# EAGLE board controller_Dio Faziko Pratama (EAGLE 9.6.2)
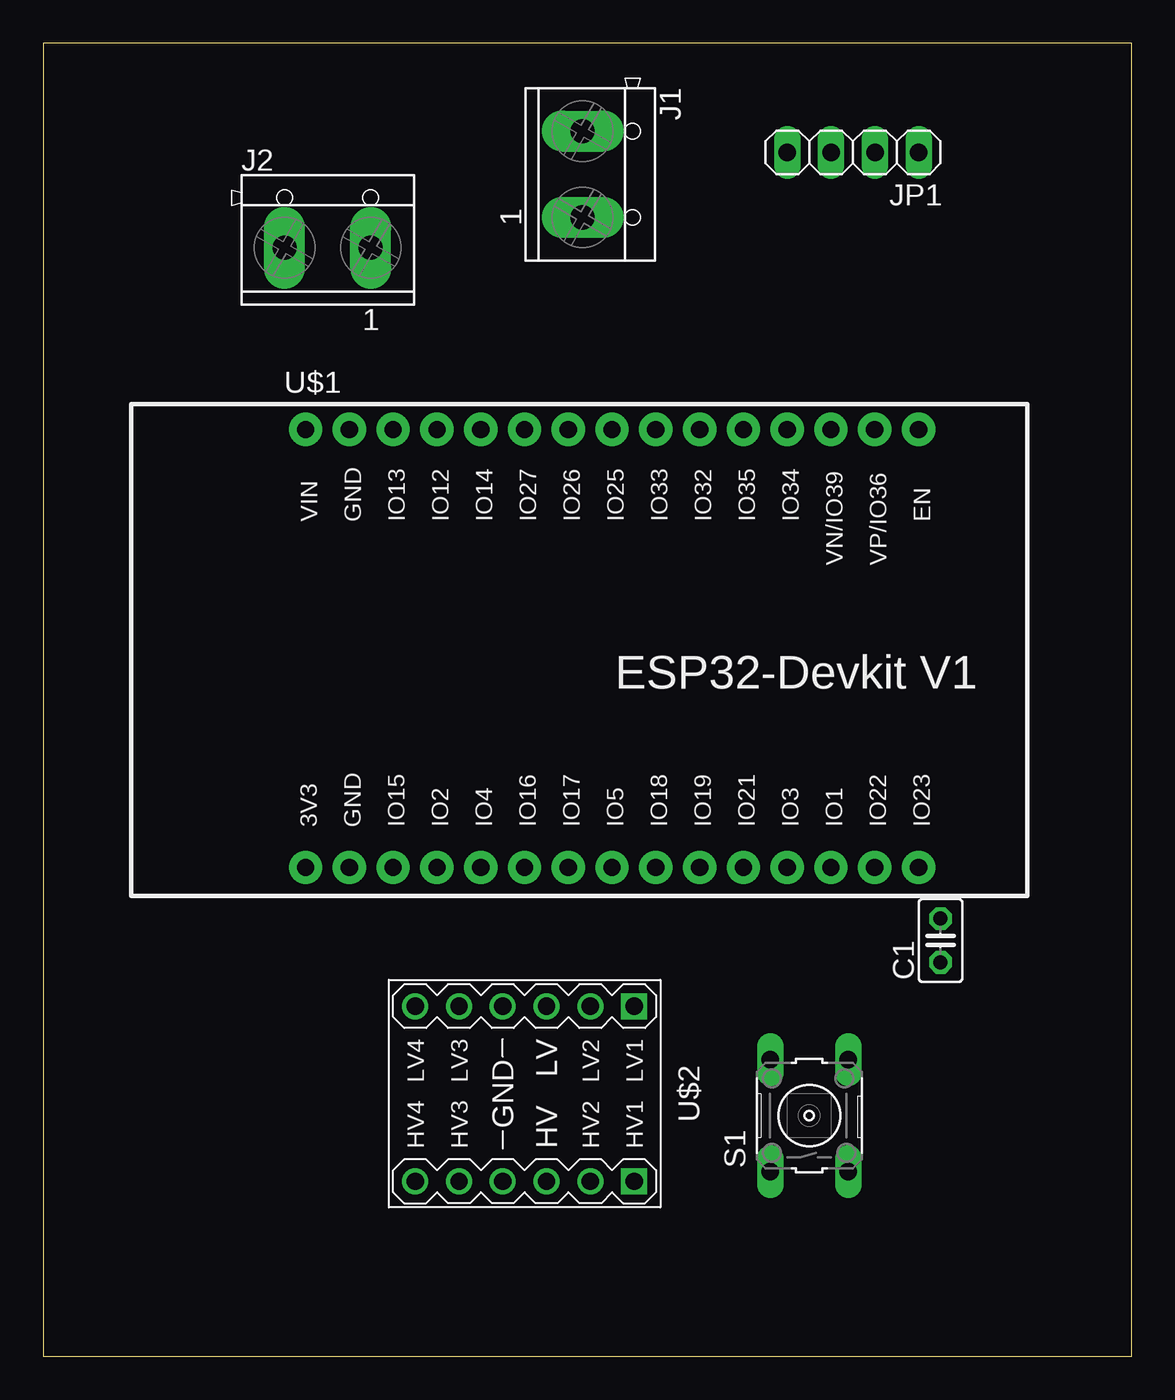
[diagram p0: board, top side]
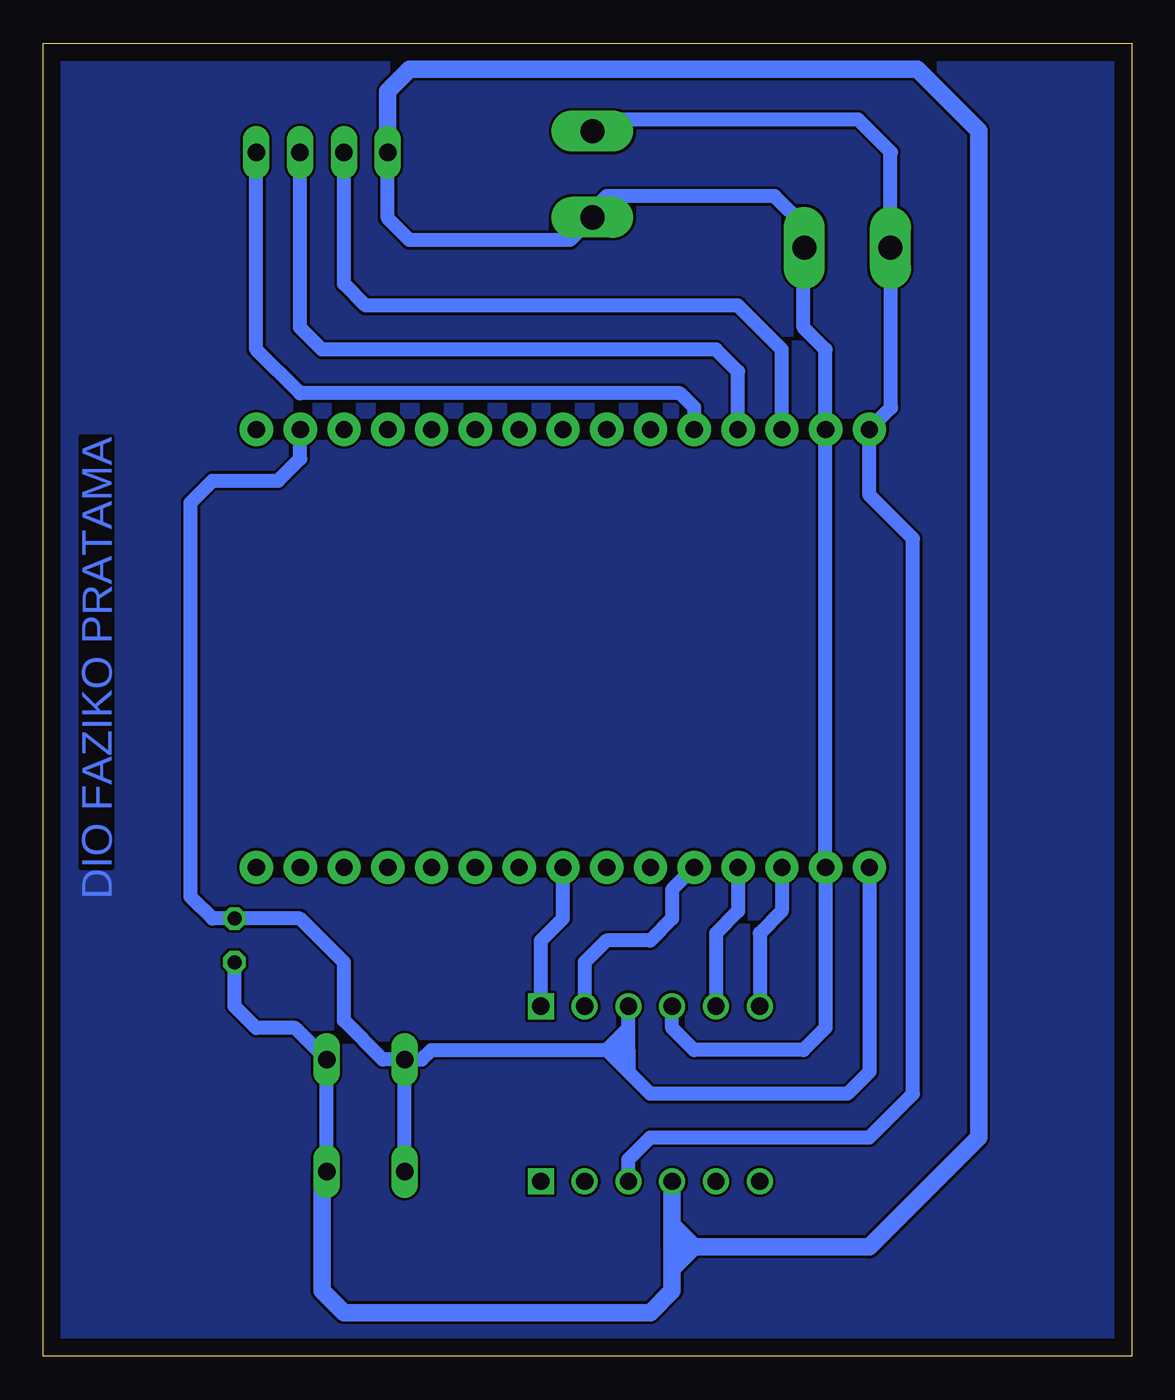
[diagram p1: board, bottom side, seen from below]

Size 63.17 x 76.19 mm. Coordinates in mm from the lower left corner, seen from the top.
Outline: 0,0 63.17,0 63.17,76.19 0,76.19 0,0
Copper layers (1*16): Top 0.035mm / dielectric 1.5mm / Bottom 0.035mm
Design rules "default": minimum track width 6mil, minimum drill 0.35mm, track to track 6mil, track to pad 6mil, pad to pad 6mil, via to via 6mil, smd to smd 6mil, copper to edge 40mil, drill to drill 6mil, minimum pad ring 10mil, minimum via ring 8mil, stop-mask expansion 4mil, vias tented up to drill 0mil, thermal gap 10mil

## Footprints (pad centres in the part's own frame; a part is rotated, then mirrored left to right if it is on the bottom)
C025-025X050 = drill 0.813 octagon: 1 -1.27,0; 2 1.27,0
TERMINAL_BLOCK_2P_5 = drill 1.4 pad 2.38 long: 1 2.5,-0.45; 2 -2.5,-0.45
1X04 = drill 1.016 long: 1 -3.81,0; 2 -1.27,0; 3 1.27,0; 4 3.81,0
B3F-10XX = drill 1.016 long: 1 -3.251,2.261; 2 3.251,2.261; 3 -3.251,-2.261; 4 3.251,-2.261
ESP32-DEVKITV1 = drill 1 pad 1.93: 3V3 -16.52,-12.27; D1 13.96,-12.27; D2 -8.9,-12.27; D3 11.42,-12.27; D4 -6.36,-12.27; D5 1.26,-12.27; D12 -8.9,13.135; D13 -11.44,13.135; D14 -6.36,13.135; D15 -11.44,-12.27; D16 -3.82,-12.27; D17 -1.28,-12.27; D18 3.8,-12.27; D19 6.34,-12.27; D21 8.88,-12.27; D22 16.5,-12.27; D23 19.04,-12.27; D25 1.26,13.135; D26 -1.28,13.135; D27 -3.82,13.135; D32 6.34,13.135; D33 3.8,13.135; D34 11.42,13.135; D35 8.88,13.135; D36 16.5,13.135; D39 13.96,13.135; EN 19.04,13.135; GND@1 -13.98,13.135; GND@2 -13.98,-12.27; VIN -16.52,13.135
LEVEL-SHIFTER-4CH = drill 1 square: J1.1 -5.08,6.35; J2.1 5.08,6.35 | drill 1: J1.2 -5.08,3.81; J1.3 -5.08,1.27; J1.4 -5.08,-1.27; J1.5 -5.08,-3.81; J1.6 -5.08,-6.35; J2.2 5.08,3.81; J2.3 5.08,1.27; J2.4 5.08,-1.27; J2.5 5.08,-3.81; J2.6 5.08,-6.35

## Placement (x,y rotation side)
C1  [C025-025X050]  52.07,24.13 90 top
J1  CON_TERMINAL_BLOCK_02-5MM  [TERMINAL_BLOCK_2P_5]  31.75,68.58 270 top
J2  CON_TERMINAL_BLOCK_02-5MM  [TERMINAL_BLOCK_2P_5]  16.51,64.77 0 top
JP1  [1X04]  46.99,69.85 180 top
S1  [B3F-10XX]  44.45,13.97 90 top
U$1  ESP32DEVKITV1  [ESP32-DEVKITV1]  31.75,40.64 0 top
U$2  LEVEL-SHIFTER-4CH  [LEVEL-SHIFTER-4CH]  27.94,15.24 270 top

## Library data of the parts
C1 = rcl; SPICEPREFIX: C
J1 J2 = tblok
JP1 = pinhead
S1 = switch-omron; MPN: B3F-1000; OC_FARNELL: 176432; OC_NEWARK: 36M3542
U$1 = esp32-devkitv1
U$2 = diy-model

## Nets
GND: C1.1 J1.1 J2.1 JP1.4 S1.3 S1.4 U$1.GND@1 U$1.GND@2 U$2.J1.4 U$2.J2.4
HV: J1.2 J2.2 U$1.VIN U$2.J2.3
LV: C1.2 S1.1 S1.2 U$1.3V3 U$1.D36 U$2.J1.3
LV1: U$1.D5 U$2.J1.1
LV2: U$1.D4 U$2.J1.2
LV3: U$1.D2 U$2.J1.5
LV4: U$1.D15 U$2.J1.6
OUT1: JP1.1 U$1.D14
OUT2: JP1.2 U$1.D12
OUT3: JP1.3 U$1.D13

## Tracks (layer width: path | path; a pad name or v marks a point on that pad's centre or on a via)
GND
  Bottom 0.813: U$2.J1.4 26.67,19.05 25.4,17.78 19.05,17.78 17.77,19.06 U$1.GND@2 U$1.GND@1 17.77,58.41 19.05,59.69 19.05,64.28 J2.1 19.01,65.59 20.73,67.31 30.48,67.31 31.3,66.49 J1.1 32.61,64.77 41.91,64.77 43.18,66.04 JP1.4 | S1.3 S1.4 48.54,19.05 50.8,19.05 52.07,20.32 C1.1
  Bottom 1.016: 26.67,6.35 25.4,6.35 | 25.4,6.35 15.24,6.35 8.89,12.7 8.89,71.12 12.44,74.67 41.91,74.67 43.18,73.4 JP1.4 | 26.67,6.35 26.67,5.08 | 26.67,5.08 26.67,3.81 27.94,2.54 45.72,2.54 46.99,3.81 46.99,10.44 S1.3 | 26.67,6.35 26.67,7.62 | 26.67,7.62 U$2.J2.4 | 25.4,6.35 26.67,5.08 | 25.4,6.35 26.67,7.62
HV
  Bottom 0.813: U$2.J2.3 29.21,11.43 27.94,12.7 15.24,12.7 12.7,15.24 12.7,47.44 15.23,49.97 U$1.VIN 13.97,55.03 13.97,64.28 J2.2 14.01,69.81 13.97,69.85 15.88,71.75 30.63,71.75 J1.2
LV
  Bottom 0.813: U$1.3V3 15.23,16.52 16.51,15.24 27.94,15.24 29.21,16.51 | 29.21,17.78 29.21,16.51 | 29.21,17.78 29.21,19.05 | 29.21,19.05 U$2.J1.3 | S1.1 S1.2 | U$1.D36 48.25,52.08 49.53,50.8 53.34,50.8 54.61,49.53 54.61,26.67 53.34,25.4 C1.2 48.26,25.4 45.72,22.86 45.72,19.48 43.46,17.22 S1.2 | S1.2 41.2,17.22 40.64,17.78 30.48,17.78 | 30.48,17.78 29.21,17.78 | 29.21,19.05 30.48,17.78 | 29.21,16.51 30.48,17.78
LV1
  Bottom 0.813: U$2.J1.1 34.29,24.13 33.02,25.4 U$1.D5
LV2
  Bottom 0.813: U$1.D4 26.67,27.09 26.67,25.4 27.94,24.13 30.48,24.13 31.75,22.86 U$2.J1.2
LV3
  Bottom 0.813: U$1.D2 22.85,25.83 24.13,24.55 U$2.J1.5
LV4
  Bottom 0.813: U$1.D15 20.31,25.83 21.59,24.55 U$2.J1.6
N$1
  pour Bottom: 0,76.2 0,0 63.5,0 63.5,76.2
OUT1
  Bottom 0.813: U$1.D14 25.39,55.05 26.22,55.88 48.26,55.88 50.8,58.42 JP1.1
OUT2
  Bottom 0.813: U$1.D12 22.85,57.14 24.13,58.42 46.99,58.42 48.26,59.69 JP1.2
OUT3
  Bottom 0.813: U$1.D13 20.31,58.41 22.86,60.96 44.45,60.96 45.72,62.23 JP1.3

## Text on the board
Bottom: DIO FAZIKO PRATAMA